# Altium PCB nanoDAP.PcbDoc
Units mm, origin at the board's own origin, x right, y up, seen from the top; angles counter-clockwise.
Board outline 49 x 19 mm, 2 copper layers (Top Layer, Bottom Layer); 25 components, 26 nets, 119 pads, 37 vias.
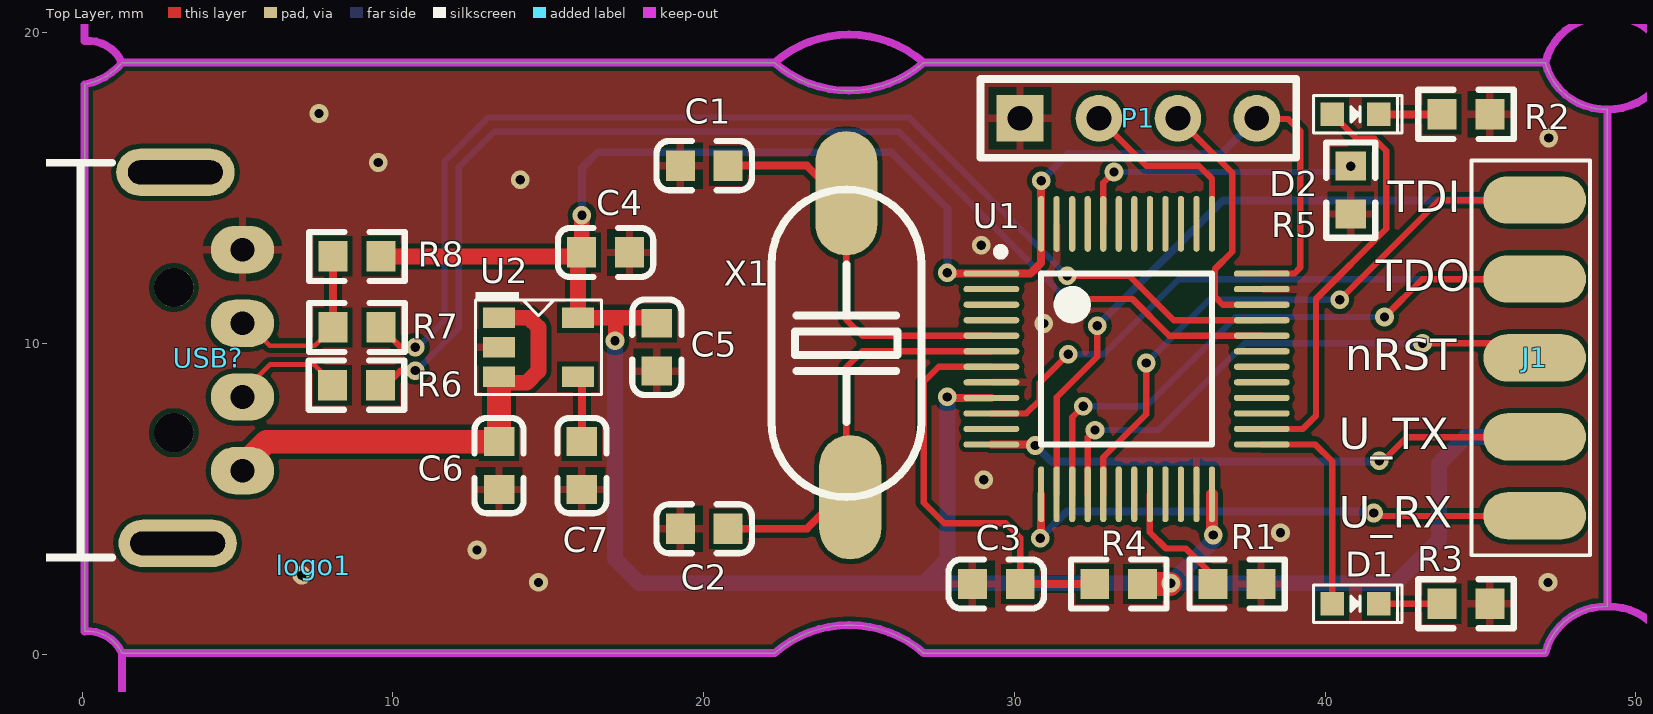
[diagram p0: Top Layer view]
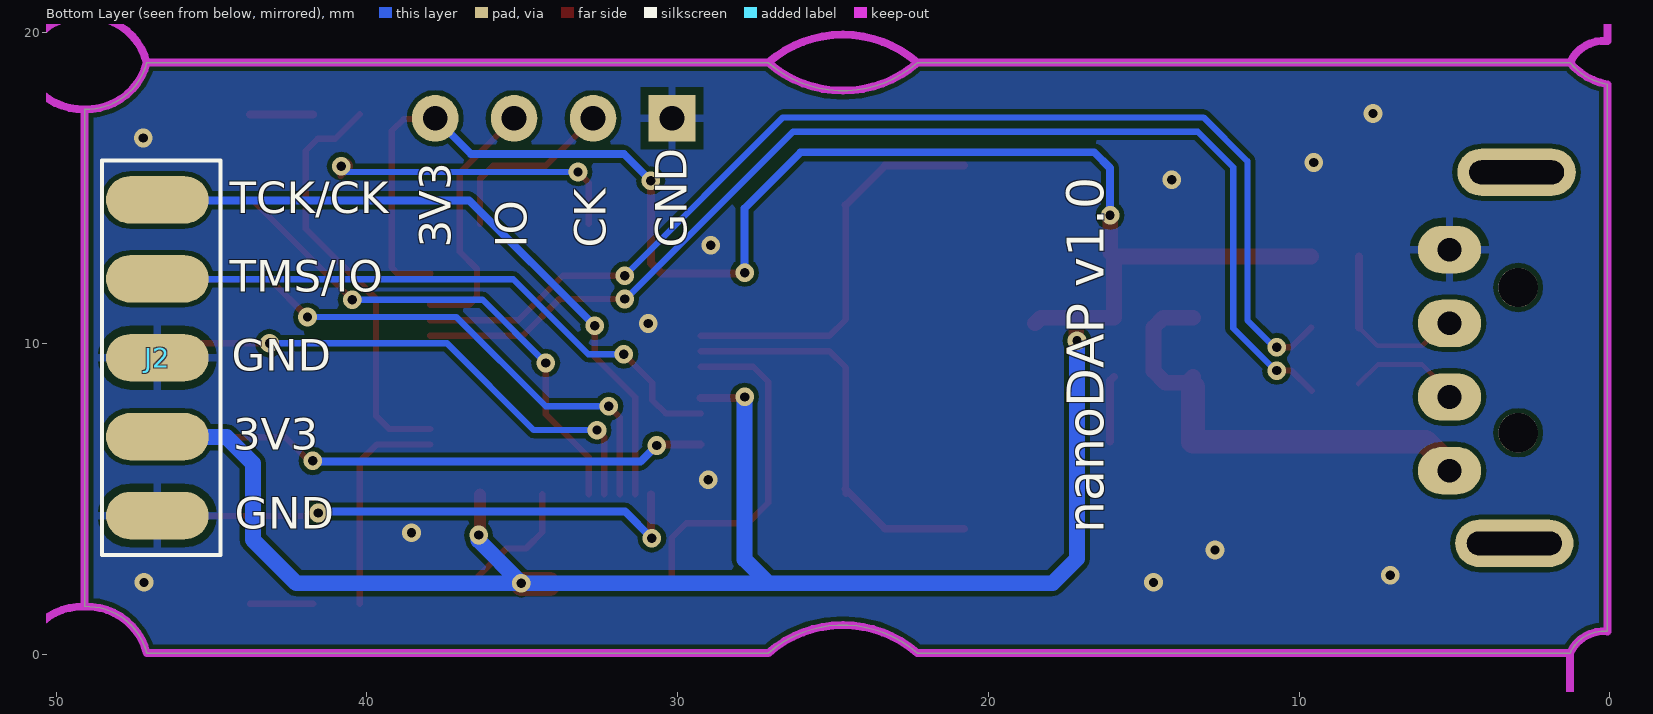
[diagram p1: Bottom Layer view, seen from below]

## Layer stack, top to bottom
Top Solder: solder mask 0.0102, Solder Resist, Dk 3.5
Top Layer: signal copper 0.0356
Dielectric 1: dielectric 0.32, FR-4, Dk 4.8
Bottom Layer: signal copper 0.0356
Bottom Solder: solder mask 0.0102, Solder Resist, Dk 3.5

## Board outline
0.083,0.744 0.083,18.345 ccw(c-0.262,20.315) 1.283,19.045 1.282,19.045 22.282,19.045 22.283,19.045 ccw(c24.683,21.784) 27.083,19.045 47.083,19.045 ccw(c49.02,19.544) 49.083,17.545 49.082,17.546 49.082,1.544 49.083,1.545 ccw(c49.019,-0.454) 47.083,0.045 47.083,0.046 27.083,0.046 27.085,0.044 ccw(c24.685,-2.695) 22.285,0.044 22.282,0.046 1.282,0.046 1.283,0.045 ccw(c0.19,-0.45)

## Design rules (kind name [scope] priority, off if disabled: settings)
Clearance [All] p1: gap=0.152 ignorepadtopadclearanceinfootprint=FALSE
DiffPairsRouting [All] p1: maxlimit=0.254 minlimit=0.254 mostfreqgap=0.254 toplayer_minwidth=0.203 toplayer_maxwidth=0.381 toplayer_prefwidth=0.381 bottomlayer_minwidth=0.203 bottomlayer_maxwidth=0.381 bottomlayer_prefwidth=0.381 maxuncoupledlength=12.7
HoleSize [All] p1 off: absolutevalues=TRUE maxlimit=2.54 minlimit=0.025 maxpercent=80.000 minpercent=20.000
PolygonConnect [All] p1: thpad.connectstyle=Relief thpad.reliefconductorwidth=0.254 thpad.reliefentries=4 thpad.polygonreliefangle="90 Angle" thpad.airgapwidth=0.254 smdpad.connectstyle=Relief smdpad.reliefconductorwidth=0.254 smdpad.reliefentries=4 smdpad.polygonreliefangle="90 Angle" smdpad.airgapwidth=0.254 via.connectstyle=Direct via.reliefconductorwidth=0.254 via.reliefentries=4 via.polygonreliefangle="90 Angle" via.airgapwidth=0.254
RoutingVias [All] p1: holewidth=0.3 width=0.6 viastyle="Through Hole" minholewidth=0.3 minwidth=0.6 maxholewidth=0.3 maxwidth=0.6
SolderMaskExpansion [All] p1: expansion=0.102
Width [All] p1: maxlimit=2.54 minlimit=0.152 preferedwidth=0.254
28 further rules are at their usual default settings.

## Classes and differential pairs
differential pair USB: +USB_P -USB_N

## Components (designator, comment, footprint, x,y, rotation, side; value= is the part's Value field where it differs from the comment)
C1 "C0603" 0603_C 20.022,15.73 r180 top value=20pF
C2 "C0603" 0603_C 20.022,4.046 r180 top value=20pF
C3 "C0603" 0603_C 29.42,2.268 r0 top value=0.1uF
C4 "1uf" 0603_C 16.847,12.936 r180 top value=1uF
C5 "104" 0603_C 18.498,9.888 r90 top value=0.1uF
C6 "1uf" 0603_C 13.418,6.078 r90 top value=1uF
C7 "223" 0603_C 16.085,6.078 r90 top
D1 "RED" 0603_LED 40.977,1.633 r0 top
D2 "BLUE" 0603_LED 40.977,17.381 r0 top
J1 "Header 5" HEADER_SMT_5 46.743,4.464 r90 top
J2 "Header 5" HEADER_SMT_5 46.743,14.629 r270 bottom
logo1 "logo" LOGO 7.449,2.878 r0 top
P1 "Header 4" HEADER_4x1 30.182,17.254 r0 top
R1 "R0603" 0603_R 37.167,2.268 r180 top value=10K
R2 "R0603" 0603_R 44.533,17.381 r180 top value=10K
R3 "R0603" 0603_R 44.533,1.633 r180 top value=10K
R4 "R0603" 0603_R 33.357,2.268 r0 top value=10K
R5 "R0603" 0603_R 40.824,14.943 r270 top value=10K
R6 "R0603" 0603_R 8.83,8.666 r180 top value=22R
R7 "R0603" 0603_R 8.846,10.523 r180 top value=22R
R8 "R0603" 0603_R 8.846,12.809 r0 top value=1K5
U1 "STM32F103C8T6" LQFP48_N 33.611,9.507 r0 top locked
U2 "RT9193-33" SOT23-5 14.688,9.888 r90 top
USB? "USB" USB_A_G 5.036,13.282 r270 top
X1 "XTAL" 49SMD 24.594,10.015 r270 top value=8MHz

## Footprints (in the part's own frame and the unit in brackets; to place one, negate y for a bottom-side part, rotate by r counter-clockwise, add the part's x,y. Pads: shape width x height; smd on the part's side, far side on the other; paste and mask are expansions set on the pad)
49SMD [mm]
  oval 4x2 smd: 1(-4.826,0) 2(4.953,0.127)
  silkscreen extent -4.95,-2.41 4.95,2.41
0603_C [mm]
  rect 0.93x0.98 smd: 1(-0.77,0) 2(0.77,0)
  silkscreen extent -1.53,-0.79 1.54,0.79, body extent -0.8,-0.4 0.8,0.4, height 0.3
0603_LED [mm]
  rect 0.75x0.75 smd: 1(-0.75,0) 2(0.75,0)
  silkscreen extent -1.35,-0.6 1.5,0.6
0603_R [mm]
  rect 0.93x0.98 smd: 1(-0.77,0) 2(0.77,0)
  silkscreen extent -1.53,-0.79 1.54,0.79, body extent -0.85,-0.4 0.85,0.4, height 0.56
HEADER_4x1 [mm]
  rect 1.5x1.5 hole 0.8: 1(0,0)
  round 1.5 hole 0.8: 2(2.54,0) 3(5.08,0) 4(7.62,0)
  silkscreen extent -1.27,-1.27 8.89,1.27
HEADER_SMT_5 [mil]
  oval 60x130 smd: 1(0,0) 2(100,0) 3(200,0) 4(300,0) 5(400,0)
  silkscreen extent -50,-70 450,80, body extent -50,-406 450,48, height 70
LOGO [mm]
LQFP48_N [mm]
  oval 1.8x0.2 smd: 1(-4.35,2.75) 2(-4.35,2.25) 3(-4.35,1.75) 4(-4.35,1.25) 5(-4.35,0.75) 6(-4.35,0.25) 7(-4.35,-0.25) 8(-4.35,-0.75) 9(-4.35,-1.25) 10(-4.35,-1.75) 11(-4.35,-2.25) 12(-4.35,-2.75) 25(4.35,-2.75) 26(4.35,-2.25) 27(4.35,-1.75) 28(4.35,-1.25) 29(4.35,-0.75) 30(4.35,-0.25) 31(4.35,0.25) 32(4.35,0.75) 33(4.35,1.25) 34(4.35,1.75) 35(4.35,2.25) 36(4.35,2.75)
  oval 0.2x1.8 smd: 13(-2.75,-4.35) 14(-2.25,-4.35) 15(-1.75,-4.35) 16(-1.25,-4.35) 17(-0.75,-4.35) 18(-0.25,-4.35) 19(0.25,-4.35) 20(0.75,-4.35) 21(1.25,-4.35) 22(1.75,-4.35) 23(2.25,-4.35) 24(2.75,-4.35) 37(2.75,4.35) 38(2.25,4.35) 39(1.75,4.35) 40(1.25,4.35) 41(0.75,4.35) 42(0.25,4.35) 43(-0.25,4.35) 44(-0.75,4.35) 45(-1.25,4.35) 46(-1.75,4.35) 47(-2.25,4.35) 48(-2.75,4.35)
  silkscreen extent -4.17,-2.75 2.75,3.57
SOT23-5 [mil]
  rect 26x40 smd: 1(37.4,50) 2(0,50) 3(-37.4,50) 4(-37.4,-50) 5(37.4,-50)
  silkscreen extent -60,-80 70,80
USB_A_G [mil]
  oval 60x80 hole 30: 1(10,5) 2(103.33,5) 3(196.67,5) 4(290,5)
  oval 60x150 hole 30 slot 120 at 90 deg: 5(-88,-80) 6(382.13,-77.13)
  round 50 hole 50: 7(58,-82) 8(242,-82)
  silkscreen extent -100,-740 400,-160, body extent -96,-778 396,10, height 178

## Part data
C1 C2 C3: "Capacitor", LatestRevisionDate=17-Jul-2002, LatestRevisionNote="Re-released for DXP Platform.", PackageDescription="Radial Cap, Thru-Hole; 2 Leads; 0.3 in Pin Spacing", PackageReference=RAD-0.3, Published=8-Jun-2000, Publisher="Altium Limited"
C4 C5 C6 C7: library part CAP, "Capacitor"
D1 D2: library part D0603, "Typical RED, GREEN, YELLOW, AMBER GaAs LED", LatestRevisionDate=17-Jul-2002, LatestRevisionNote="Re-released for DXP Platform.", PackageDescription="SM LED; 2 Flat Leads", PackageReference=3.2X1.6X1.1, PackageVersion=Feb-2002, Published=8-Jun-2000, Publisher="Altium Limited"
J1 J2: library part Header_5, "Header, 4-Pin", LatestRevisionDate=17-Jul-2002, LatestRevisionNote="Re-released for DXP Platform.", Publisher="Altium Limited"
P1: "Header, 4-Pin", LatestRevisionDate=17-Jul-2002, LatestRevisionNote="Re-released for DXP Platform.", Publisher="Altium Limited"
R1 R2 R3 R4 R5 R6 R7 R8: "Resistor", LatestRevisionDate=17-Jul-2002, LatestRevisionNote="Re-released for DXP Platform.", PackageDescription="Axial Device, Thru-Hole; 2 Leads; 0.3 in Pin Spacing", PackageReference=AXIAL-0.3, Published=8-Jun-2000, Publisher="Altium Limited"
U1: "LowPower MCU"
USB?: library part USB_G

## Free pads (board coordinates)
  round 1.5 hole 2: 0(3.282,-2.954) 0(3.302,98.044) 0(94.84,-2.954) 0(94.86,98.044)
  round 1.5 smd: 0(7.282,-2.954) 0(7.302,98.044) 0(90.84,-2.954) 0(90.86,98.044)

## Via types
v1: diameter 0.6, hole 0.3, Top Layer to Bottom Layer, 37 vias

## Nets (pads, with @x,y where several pads share a name; then routed paths per layer and width w, separated by ;. In a path a pad name is that pad's centre, name@x,y a point inside that pad or via, vN(x,y) a via of type N, cw(c..) or ccw(c..) an arc to the next point about the centre after c; other vN are vias at no path point)
3V3: C4.2 C5.2 J2.4 P1.4 R4.2 R8.2 U1.1 U1.9 U1.24 U1.36 U1.48 U2.5 | length 102.6
  Top Layer w0.203: P1.4 37.827,17.229 38.818,17.229 39.199,16.848 39.199,12.453 39.002,12.257 U1.36
  Top Layer w0.254: v1(27.845,8.288) 27.876,8.257 U1.9 ; v1@27.876,12.257 U1.1 30.519,12.257 30.861,12.599 U1.48 30.861,15.241 v1(30.868,15.247) ; v1@35.008,2.268 v1(35.033,2.293) ; v1@36.361,3.887 v1(36.405,3.843)
  Top Layer w0.381: v1@36.361,3.887 U1.24
  Top Layer w0.508: R8.2 15.95,12.809 C4.2@15.958,12.817 ; v1(16.085,14.13) 16.077,14.122 C4.2 C4.2@15.958,12.817 ; v1(17.152,10.091) 17.177,10.117 17.177,10.838 ; C5.2 18.318,10.838 17.177,10.838 ; C4.2@15.958,12.817 U2.5 17.177,10.838
  Top Layer w0.762: R4.2 v1@35.008,2.268
  Bottom Layer w0.254: v1(16.085,14.13) 16.085,15.654 16.593,16.162 26.042,16.162 27.845,14.358 v1(27.845,12.288) ; v1(30.868,15.247) 31.731,16.111 36.659,16.111 P1.4
  Bottom Layer w0.508: v1(17.152,10.091) 17.152,3.081 17.939,2.293 27.083,2.293 ; v1(27.845,8.288) 27.845,3.055 27.083,2.293 ; v1(36.405,3.843) 36.405,3.665 v1(35.033,2.293) ; J2.4@46.743,6.994 44.507,6.994 43.669,6.156 43.669,3.69 42.272,2.293 v1(35.033,2.293) ; 27.083,2.293 v1(35.033,2.293)
5V_USB: C6.2 U2.1 U2.3 USB?.4 | length 14.6
  Top Layer w0.508: U2.3 13.611,8.745 14.307,8.745 14.688,9.126 14.688,10.523 14.373,10.838 U2.1
  Top Layer w0.762: USB?.4@5.163,6.078 5.933,6.848 C6.2 U2.3@13.418,8.618
BOOT0: R5.1 U1.44 | length 9.8
  Top Layer w0.203: U1.44 32.861,15.183 v1(33.204,15.527) ; R5.1@40.715,15.527 R5.1@40.842,15.4
  Top Layer w0.508: R5.1@40.705,15.713 v1(40.824,15.713)
  Bottom Layer w0.203: v1(33.204,15.527) 40.639,15.527 v1(40.824,15.713)
BOOT1: R1.2 U1.20 | length 4.1
  Top Layer w0.203: U1.20 34.361,3.931 34.881,3.411 35.516,3.411 36.397,2.53 R1.2
D_SWCLK: P1.2 U1.37 | length 5.9
  Top Layer w0.203: P1.2 34.246,15.73 35.936,15.73 36.361,15.305 U1.37
D_SWDIO: P1.3 U1.34 | length 8.3
  Top Layer w0.203: P1.3 37.014,15.501 37.014,12.961 36.456,12.403 36.456,11.514 36.712,11.257 U1.34
GND: C1.2 C2.2 C3.1 C4.1 C5.1 C6.1 C7.1 J2.3 J2.5 P1.1 R1.1 R2.1 R3.1 R5.2 U1.8 U1.23 U1.35 U1.47 U2.2 USB?.1
  other v1: 14.688,2.319 47.174,2.319 7.068,2.547 12.707,3.36 38.564,3.919 29.013,5.621 30.944,10.65 28.937,13.165 14.104,15.273 9.532,15.832 47.2,16.619 7.627,17.406
LED_CON: D2.1 U1.26 | length 13.6
  Top Layer w0.203: U1.26 39.286,7.257 39.707,7.678 39.707,11.437 41.967,13.698 41.967,16.213 41.586,16.594 41.014,16.594 D2.1
LED_RUN: D1.1 U1.25 | length 7.1
  Top Layer w0.203: U1.25 39.688,6.757 40.227,6.218 D1.1
NetC1_1: C1.1 U1.5 X1.1 | length 12.9
  Top Layer w0.203: X1.1@24.594,14.46 24.594,10.777 25.114,10.257 U1.5
  Top Layer w0.254: C1.1 23.324,15.73 X1.1@24.594,14.46
NetC2_1: C2.1 U1.6 X1.2 | length 13.3
  Top Layer w0.203: X1.2@24.594,5.173 24.594,9.237 25.114,9.757 U1.6
  Top Layer w0.254: C2.1 23.324,4.046 X1.2@24.594,5.316
NetC3_2: C3.2 R4.1 U1.7 | length 13.7
  Top Layer w0.203: U1.7 27.57,9.257 27.083,8.77 27.083,4.884 27.743,4.224 29.725,4.224 30.19,3.759 C3.2
  Top Layer w0.254: C3.2 R4.1
NetC7_2: C7.2 U2.4 | length 2.1
  Top Layer w0.254: U2.4 16.085,8.811 C7.2
NetD1_2: D1.2 R3.2 | length 2
  Top Layer w0.203: D1.2 R3.2
NetD2_2: D2.2 R2.2 | length 2
  Top Layer w0.254: D2.2 R2.2
NetR6_2: R6.2 USB?.3 | length 3.6
  Top Layer w0.152: USB?.3@5.163,8.449 6.043,9.329 7.474,9.329 R6.2@8.099,8.705
NetR7_2: R7.2 R8.1 USB?.2 | length 5.8
  Top Layer w0.152: USB?.2@5.163,10.819 6.043,9.939 7.492,9.939 R7.2
  Top Layer w0.254: R7.2 R8.1
nRST: J1.3 U1.16 | length 17.7
  Top Layer w0.203: U1.16 32.361,6.987 v1(32.595,7.221) ; v1(43.136,10.015) 46.262,10.015 J1.3@46.743,9.534
  Bottom Layer w0.203: v1(32.595,7.221) 34.627,7.221 37.421,10.015 v1(43.136,10.015)
TCK_SWCLK: J2.1 U1.14 | length 21.7
  Top Layer w0.203: U1.14 31.361,8.273 32.671,9.583 v1(32.671,10.574)
  Bottom Layer w0.254: v1(32.671,10.574) 36.711,14.614 J2.1@46.743,14.614
TDI: J1.5 U1.17 | length 19.5
  Top Layer w0.203: U1.17 32.861,6.35 34.246,7.735 v1(34.246,9.38) ; v1(40.469,11.412) 43.671,14.614 J1.5@46.743,14.614
  Bottom Layer w0.203: v1(34.246,9.38) 36.278,11.412 v1(40.469,11.412)
TDO: J1.4 U1.15 | length 19.2
  Top Layer w0.203: U1.15 31.861,7.63 v1(32.214,7.983) ; v1(41.912,10.858) 43.128,12.074 J1.4@46.743,12.074
  Bottom Layer w0.203: v1(32.214,7.983) 34.246,7.983 37.121,10.858 v1(41.912,10.858)
TMS_SWDIO: J2.2 U1.10 | length 19.6
  Top Layer w0.203: U1.10 30.388,7.757 30.817,8.186 30.817,8.745 v1(31.731,9.659)
  Bottom Layer w0.203: v1(31.731,9.659) 32.874,9.659 35.289,12.074 J2.2@46.743,12.074
UART2_RX: J1.1 U1.13 | length 17.7
  Top Layer w0.203: v1(41.561,4.554) 41.661,4.454 J1.1@46.743,4.454
  Top Layer w0.254: v1@30.861,3.772 U1.13
  Bottom Layer w0.254: v1(30.83,3.741) 31.694,4.605 41.51,4.605 v1(41.561,4.554)
UART2_TX: J1.2 U1.12 | length 18
  Top Layer w0.203: v1(41.739,6.23) 41.866,6.23 42.629,6.994 J1.2@46.743,6.994
  Top Layer w0.254: U1.12 v1@30.646,6.757
  Bottom Layer w0.254: v1(30.677,6.726) 31.198,6.205 41.713,6.205 v1(41.739,6.23)
USB_N: R6.1 U1.32 | length 37.6
  Top Layer w0.203: R6.1@9.6,8.488 10.247,9.136 v1(10.725,9.136) ; v1(31.706,11.437) 33.802,11.437 34.983,10.257 U1.32
  Bottom Layer w0.203: v1(10.725,9.136) 10.756,9.136 12.122,10.502 12.122,15.679 13.265,16.822 26.29,16.822 31.675,11.437 v1(31.706,11.437)
USB_P: R7.1 U1.33 | length 37.4
  Top Layer w0.203: R7.1 10.251,9.888 v1(10.725,9.888) ; v1(31.706,12.19) 33.697,12.19 35.135,10.752 35.998,10.752 36.004,10.757 U1.33
  Bottom Layer w0.203: v1(10.725,9.888) 10.802,9.888 11.665,10.752 11.665,15.869 13.076,17.279 26.616,17.279 v1(31.706,12.19)
pads on no net: U1.2 U1.3 U1.4 U1.11 U1.18 U1.19 U1.21 U1.22 U1.27 U1.28 U1.29 U1.30 U1.31 U1.38 U1.39 U1.40 U1.41 U1.42 U1.43 U1.45 U1.46 USB?.5 USB?.6 USB?.7 USB?.8

## Polygon pours and split planes (outlines as drawn)
GND on Top Layer "GND_L01_P000" (solid, remove dead copper, pour order 0): 0.083,-0.018 0.083,19.159 49.105,19.159 49.105,-0.018
GND on Bottom Layer "GND_L02_P002" (solid, remove dead copper, pour order 2): 0.083,-0.018 0.083,19.159 49.105,19.159 49.105,-0.018

## Keep-outs
Keep-Out Layer:
  lines w0.254: 0.082,57.745 cw(c0.189,56.55) 1.282,57.045 22.282,57.045 ccw(c24.683,59.784) 27.083,57.045 47.083,57.045 ccw(c49.02,57.544) 49.083,55.545 ccw(c49.146,57.544) 51.082,57.045 71.082,57.045 ; 0.082,75.345 ccw(c-0.263,77.315) 1.282,76.045 ; 0.081,76.744 cw(c0.188,75.549) 1.281,76.044 ; 0.083,0.745 cw(c0.19,-0.45) 1.283,0.045 ; 0.083,19.745 cw(c0.19,18.55) 1.283,19.045 cw(c-0.262,20.315) 0.083,18.345 ; 0.083,37.345 ccw(c-0.262,39.315) 1.283,38.045 ccw(c0.19,37.55) 0.083,38.745 ; 0.083,56.345 ccw(c-0.262,58.315) 1.283,57.045 ; 1.281,57.045 22.281,57.045 ; 1.28,95.044 22.28,95.044 ; 1.281,95.044 cw(c-0.264,96.315) 0.081,94.345 ; 1.282,19.045 22.282,19.045 ; 1.282,19.045 22.282,19.045 ccw(c24.683,21.784) 27.083,19.045 47.083,19.045 ; 1.282,38.045 22.282,38.045 ccw(c24.683,40.784) 27.083,38.045 47.083,38.045 ; 1.282,38.045 22.282,38.045 ; 1.302,95.044 1.302,100.044 96.86,100.044 96.86,95.044 ; 22.281,95.044 ccw(c24.681,97.783) 27.081,95.044 ; 22.282,0.046 1.282,0.046 1.282,-4.954 96.84,-4.954 96.84,0.046 ; 22.282,76.045 ccw(c24.682,78.784) 27.082,76.045 ; 22.284,57.043 cw(c24.684,54.304) 27.084,57.043 ; 22.283,76.043 cw(c24.683,73.304) 27.083,76.043 ; 22.285,0.044 cw(c24.685,-2.695) 27.085,0.044 ; 22.285,19.044 cw(c24.685,16.305) 27.085,19.044 ; 22.285,38.044 cw(c24.685,35.305) 27.085,38.044 ; 27.082,57.045 47.082,57.045 cw(c49.018,56.546) 49.082,58.544 ; 27.081,95.044 47.081,95.044 ; 27.083,0.046 47.083,0.046 cw(c49.019,-0.454) 49.083,1.545 cw(c49.146,-0.454) 51.083,0.045 ; 27.083,19.045 47.083,19.045 ; 27.083,38.045 47.083,38.045 ; 47.081,76.044 cw(c49.017,75.545) 49.081,77.544 ; 47.081,95.044 ccw(c49.018,95.543) 49.081,93.544 49.08,77.543 ; 49.081,58.544 49.081,74.546 ; 49.082,1.544 49.082,17.546 ; 49.082,20.544 49.082,36.546 ; 49.082,39.544 49.082,55.546 ; 49.082,74.545 cw(c49.019,76.544) 47.082,76.045 ; 49.083,1.544 49.083,17.546 ; 49.083,20.544 49.083,36.546 ; 49.083,55.546 49.083,39.544 ; 49.084,58.544 49.084,74.546 ; 49.084,58.544 cw(c49.147,56.546) 51.084,57.045 71.083,57.045 ccw(c73.483,59.784) 75.883,57.045 96.884,57.045 ; 49.084,74.545 ccw(c49.147,76.544) 51.083,76.045 71.083,76.044 ccw(c73.484,78.784) 75.884,76.045 96.885,76.044 cw(c97.978,75.549) 98.085,76.744 ; 49.085,77.544 cw(c49.148,75.545) 51.085,76.044 71.084,76.045 ; 49.085,93.544 ccw(c49.148,95.543) 51.084,95.044 ; 49.085,77.543 49.085,93.545 ; 51.082,0.046 71.082,0.046 ; 51.082,19.045 71.082,19.045 ; 51.082,38.045 71.082,38.045 ; 51.083,19.045 ccw(c49.146,18.546) 49.083,20.545 ccw(c49.019,18.546) 47.083,19.045 ; 51.083,38.045 ccw(c49.146,37.546) 49.083,39.545 ; 51.084,95.044 71.084,95.044 ; 71.08,0.044 cw(c73.48,-2.695) 75.88,0.044 ; 71.08,19.044 cw(c73.48,16.305) 75.88,19.044 ; 71.08,38.044 cw(c73.48,35.305) 75.88,38.044 ; 71.082,19.045 51.082,19.045 cw(c49.146,19.544) 49.083,17.545 ; 71.082,38.045 51.082,38.045 cw(c49.146,38.544) 49.083,36.545 cw(c49.02,38.544) 47.083,38.045 ; 71.081,57.043 cw(c73.481,54.304) 75.881,57.043 ; 71.082,76.043 cw(c73.482,73.304) 75.882,76.043 ; 71.083,19.045 ccw(c73.483,21.784) 75.883,19.045 96.884,19.045 ; 71.083,38.045 ccw(c73.483,40.784) 75.883,38.045 96.884,38.045 ; 71.085,95.044 ccw(c73.485,97.783) 75.885,95.044 ; 75.883,0.046 96.884,0.046 cw(c97.976,-0.45) 98.083,0.745 ; 75.883,19.045 96.884,19.045 ; 75.883,38.045 96.884,38.045 ; 75.884,57.045 96.885,57.045 ; 75.885,76.045 96.886,76.045 ; 75.885,95.044 96.886,95.044 ; 96.884,76.045 ccw(c98.429,77.315) 98.084,75.345 ; 96.885,95.044 ccw(c98.43,96.315) 98.085,94.345 ; 98.083,19.745 ccw(c97.976,18.55) 96.883,19.045 ; 98.083,37.345 cw(c98.428,39.315) 96.883,38.045 ; 98.083,56.345 cw(c98.428,58.315) 96.883,57.045 ; 98.084,57.745 ccw(c97.977,56.55) 96.884,57.045 ; 0.081,94.346 0.081,76.743 0.081,94.346 ; 0.083,18.346 0.083,0.744 0.083,18.346 ; 0.083,38.744 0.083,56.346 0.083,38.744 ; 1.281,76.044 22.281,76.044 1.28,76.045 ; 27.082,76.044 47.082,76.044 ; 27.081,76.045 47.081,76.045 ; 47.083,19.045 ccw(c49.02,19.544) 49.083,17.545 ; 47.083,38.045 cw(c49.019,37.546) 49.083,39.545 ; 96.883,19.045 ccw(c98.428,20.315) 98.083,18.345 ; 96.883,38.045 cw(c97.976,37.55) 98.083,38.745 ; 98.083,18.346 98.083,0.744 98.083,18.346 ; 98.083,38.744 98.083,56.346 98.083,38.744 ; 98.085,94.346 98.085,76.743 98.085,94.346 ; 0.082,57.744 0.082,75.346 0.082,57.744 ; 0.083,19.744 0.083,37.346 0.083,19.744 ; 98.083,19.744 98.083,37.346 98.083,19.744 ; 98.084,57.744 98.084,75.346 98.084,57.744

## Silkscreen, mask and mechanical layers (free items; w line width, h text height)
Top Overlay:
  text "TDI" at 42.009,14.231 h1.02
  text "TDO" at 41.636,11.691 h1.02
  text "nRST" at 40.646,9.151 h1.02
  text "U_TX" at 40.443,6.611 h1.02
  text "U_RX" at 40.443,4.071 h1.02
Bottom Overlay:
  text "TCK/CK" at 44.406,14.206 h1.02
  text "GND" at 29.699,13.088 h1.02 r270
  text "CK" at 32.315,13.088 h1.02 r270
  text "IO" at 34.855,13.088 h1.02 r270
  text "3V3" at 37.294,13.088 h1.02 r270
  text "TMS/IO" at 44.406,11.666 h1.02
  text "GND" at 44.355,9.126 h1.02
  text "3V3" at 44.304,6.586 h1.02
  text "GND" at 44.253,4.046 h1.02
  text "nanoDAP v1.0" at 15.901,3.895 h2.03 r270
Top Solder:
  region: 12.452,16.633 12.456,16.625 12.455,16.625 12.509,16.346 12.512,16.337 12.518,16.335 12.752,16.238 12.757,16.236 12.766,16.24 13.001,16.399 13.009,16.403 13.021,16.398 13.02,16.397 13.222,16.197 13.226,16.186 13.223,16.177 13.063,15.942 13.06,15.934 13.062,15.928 13.159,15.694 13.161,15.689 13.17,15.685 13.449,15.632 13.457,15.628 13.462,15.617 13.461,15.617 13.462,15.333 13.457,15.321 13.449,15.318 13.448,15.318 13.17,15.265 13.161,15.261 13.159,15.255 13.062,15.022 13.06,15.016 13.063,15.008 13.064,15.008 13.223,14.773 13.226,14.764 13.222,14.753 13.221,14.754 13.021,14.552 13.009,14.547 13.001,14.551 12.766,14.71 12.757,14.714 12.752,14.712 12.645,14.667 12.639,14.665 12.628,14.67 12.625,14.676 12.428,15.158 12.426,15.163 12.431,15.175 12.436,15.177 12.438,15.173 12.535,15.238 12.608,15.347 12.633,15.475 12.608,15.603 12.535,15.712 12.427,15.784 12.299,15.81 12.171,15.784 12.062,15.712 11.99,15.603 11.964,15.475 11.99,15.347 12.062,15.238 12.16,15.173 12.161,15.177 12.167,15.175 12.171,15.163 12.169,15.158 11.972,14.676 11.97,14.67 11.958,14.665 11.953,14.667 11.846,14.712 11.84,14.714 11.831,14.71 11.832,14.71 11.597,14.551 11.588,14.547 11.577,14.552 11.578,14.553 11.376,14.753 11.371,14.764 11.375,14.773 11.534,15.008 11.538,15.016 11.535,15.022 11.439,15.255 11.436,15.261 11.428,15.265 11.428,15.264 11.149,15.318 11.14,15.321 11.136,15.333 11.137,15.333 11.136,15.617 11.14,15.628 11.149,15.632 11.428,15.685 11.436,15.689 11.439,15.694 11.535,15.928 11.538,15.934 11.534,15.942 11.375,16.177 11.371,16.186 11.376,16.197 11.377,16.196 11.577,16.398 11.588,16.403 11.597,16.399 11.831,16.24 11.84,16.236 11.846,16.238 12.079,16.335 12.085,16.337 12.089,16.346 12.088,16.346 12.142,16.625 12.145,16.633 12.157,16.638 12.157,16.637 12.441,16.638
Bottom Solder:
  drawing of 10 lines, arcs and shapes, not listed